# Altium PCB HGD_Sensor(v0.1)-20200729.PcbDoc
Units mm, origin at the board's own origin, x right, y up, seen from the top; angles counter-clockwise.
Board outline 58.4 x 54 mm, 2 copper layers (TopLayer, BottomLayer); 62 components, 38 nets, 190 pads, 4 vias.
Unrouted connection lines stored in the file: 97.
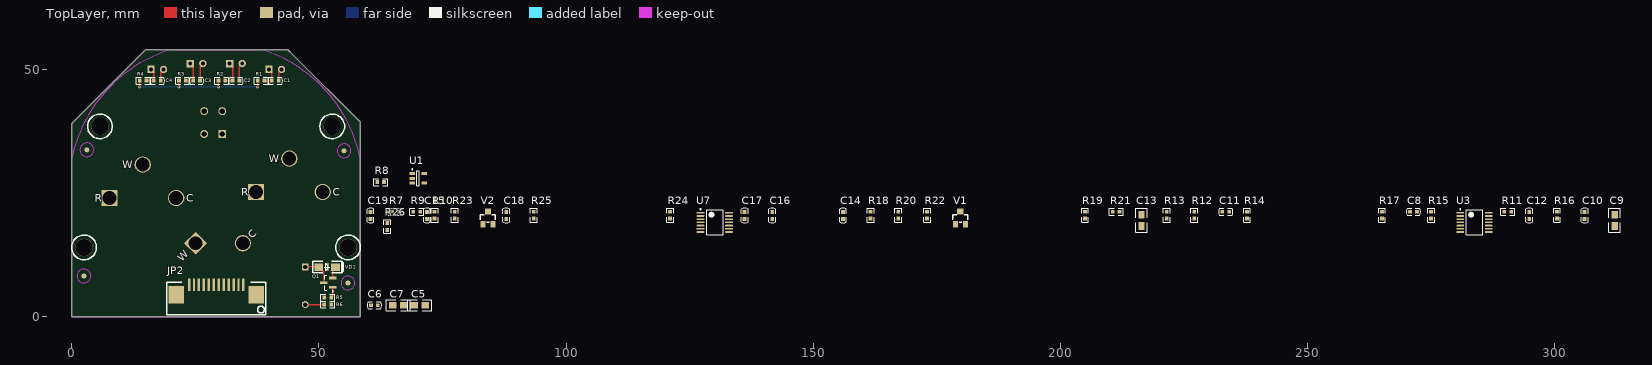
[diagram p0: TopLayer view]
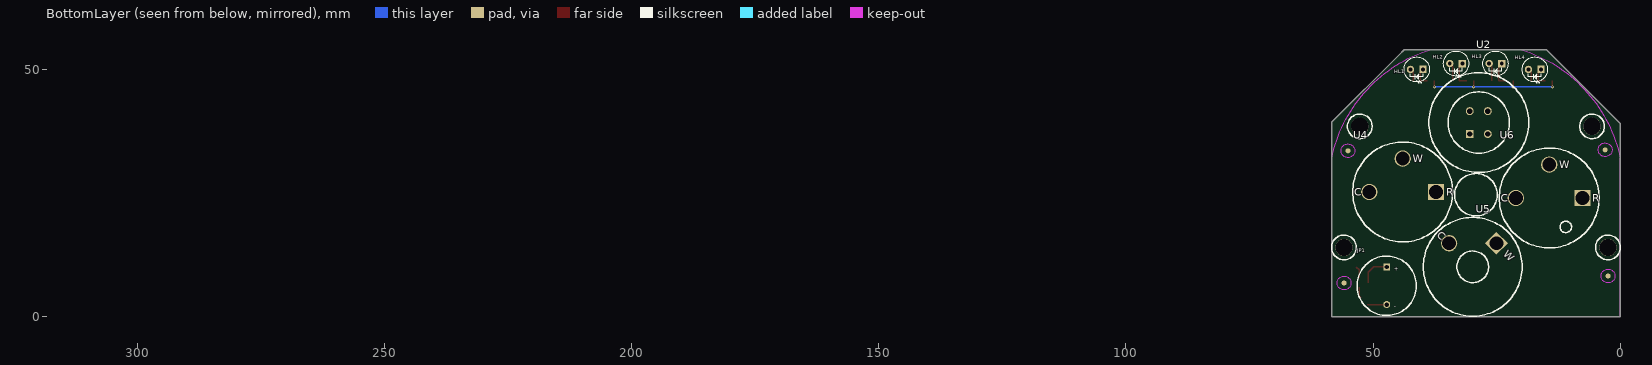
[diagram p1: BottomLayer view, seen from below]

## Layer stack, top to bottom
TopLayer: signal copper 0.0356
Dielectric: core 0.32, FR-4, Dk 4.8
BottomLayer: signal copper 0.0356

## Board outline
0,0 58.4,0 58.4,39.314 44.755,52.959 43.714,54 38.5,54 19.913,54 19.903,53.99 14.899,53.99 0.762,39.853 0,39.091 0,32 0,0

## Design rules (kind name [scope] priority, off if disabled: settings)
Clearance Clearance_2 [InNet('RF_IN') vs InNet('GND')] p1: gap=0.5
Clearance [All] p2: gap=0.254
Clearance Clearance_1 [All] p3: gap=0.254
ComponentClearance [All] p1 off: gap=0.254 collisioncheckmode=3 verticalgap=0.254 showdistances=FALSE
FabricationTestPointUsage TestPointUsage [All] p1: valid=0 allowmultiple=FALSE
FabricationTestpoint Testpoint [(IsPad And (OnTopLayer Or OnBottomLayer))] p1: side=3 testpointundercomponent=TRUE minsize=1.016 maxsize=2.54 preferedsize=1.524 minholesize=0.508 maxholesize=1.016 preferedholesize=0.813 testpointgrid=0.025 allowsidetop=TRUE allowsidebottom=TRUE usegrid=TRUE gridtolerance=0
HoleSize [All] p1: absolutevalues=TRUE maxlimit=5.08 minlimit=0.025 maxpercent=80.000 minpercent=20.000
PolygonConnect [IsVia] p1: connectstyle=Direct reliefconductorwidth=0.254 reliefentries=4 polygonreliefangle="90 Angle"
PolygonConnect PolygonConnect_via [All] p2 off: connectstyle=Relief reliefconductorwidth=0.254 reliefentries=4 polygonreliefangle="90 Angle"
RoomDefinition HGD_Sensor(v0.1)-20200729 [InComponentClass('HGD_Sensor(v0.1)-20200729')] p1: confinementstyle=ConfineIn formatcopy=TRUE lockcomponents=FALSE outline 59.538,1.397 84.455,1.397 84.455,9.677 59.538,9.677
RoutingVias [All] p1: holewidth=0.4 width=0.8 viastyle="Through Hole" minholewidth=0.3 minwidth=0.6 maxholewidth=0.5 maxwidth=1
ShortCircuit [All] p1 off: allowed=FALSE
SilkscreenOverComponentPads [All] p1: minsilkscreentomaskgap=0.254
SolderMaskExpansion [All] p1: expansion=0.102
Width [All] p1: maxlimit=2.54 minlimit=0.127 preferedwidth=0.254
22 further rules are at their usual default settings.

## Components (designator, comment, footprint, x,y, rotation, side; value= is the part's Value field where it differs from the comment)
C1 "100nF/25V/5%" C0603 40.488,47.752 r0 top locked
C2 "100nF/25V/5%" C0603 32.537,47.752 r0 top locked
C3 "100nF/25V/5%" C0603 24.562,47.752 r0 top locked
C4 "100nF/25V/5%" C0603 16.612,47.752 r0 top locked
C5 "1uF/25V/5%" 0805 69.24,2.311 r0 top
C6 "10nF/25V/5%" C0603 60.528,2.311 r0 top
C7 "1uF/25V/5%" 0805 64.897,2.311 r0 top
C8 "10nF/25V/5%" C0603 270.739,21.234 r0 top
C9 "1uF/25V/5%" 0805 312.141,18.339 r90 top
C10 "1uF/25V/5%" C0603 306.07,19.761 r90 top
C11 "10nF/25V/5%" C0603 232.766,21.234 r0 top
C12 "100nF/25V/5%" C0603 294.894,19.761 r90 top
C13 "1uF/25V/5%" 0805 216.408,18.339 r90 top
C14 "10nF/25V/5%" C0603 156.032,19.761 r90 top
C15 "10nF/25V/5%" C0603 71.882,19.761 r90 top
C16 "10nF/25V/5%" C0603 141.707,19.761 r90 top
C17 "100nF/25V/5%" C0603 136.119,19.761 r90 top
C18 "10nF/25V/5%" C0603 87.909,19.761 r90 top
C19 "10nF/25V/5%" C0603 60.452,19.761 r90 top
HL1 "LED红灯" LED-3MM 39.903,50.013 r0 bottom locked
HL2 "LED红灯" LED-3MM 31.953,51.206 r0 bottom locked
HL3 "LED红灯" LED-3MM 23.978,51.206 r0 bottom locked
HL4 "LED红灯" LED-3MM 16.027,50.013 r0 bottom locked
JP1 "TMB-12A03" TMB-12A03 47.244,6.248 r180 bottom locked
JP2 "FPC-12P" FPC-1.0MM-12P-W 29.235,6.426 r180 top
Q1 "S8550" S8550_SOT-23_95P245X110-3N 51.892,6.883 r180 top
R1 "200R/5%" R0603 39.014,47.752 r180 top locked
R2 "200R/5%" R0603 31.064,47.752 r180 top locked
R3 "200R/5%" R0603 23.089,47.752 r180 top locked
R4 "200R/5%" R0603 15.138,47.752 r180 top locked
R5 "4K7/5%" R0603 51.105,3.861 r0 top
R6 "100R/5%" R0603 52.502,2.464 r180 top
R7 "1K/5%" R0603 64.77,21.234 r0 top
R8 "4K7/5%" R0603 61.798,27.229 r0 top
R9 "4K7/5%" R0603 69.088,21.234 r0 top
R10 "4K7/5%" R0603 73.406,19.837 r90 top
R11 "10K/5%" R0603 289.814,21.234 r0 top
R12 "4K7/5%" R0603 227.101,19.837 r90 top
R13 "4K7/5%" R0603 221.513,19.837 r90 top
R14 "100R/5%" R0603 237.769,19.837 r90 top
R15 "470R/5%" R0603 275.006,19.837 r90 top
R16 "10K/5%" R0603 300.482,19.837 r90 top
R17 "10K/5%" R0603 265.074,19.837 r90 top
R18 "1M/5%" R0603 161.62,19.837 r90 top
R19 "200R/5%" R0603 205.003,19.837 r90 top
R20 "200R/5%" R0603 167.208,19.837 r90 top
R21 "47K/5%" R0603 210.591,21.234 r0 top
R22 "10K/5%" R0603 173.05,19.837 r90 top
R23 "1M/5%" R0603 77.47,19.837 r90 top
R24 "1K/5%" R0603 121.056,19.837 r90 top
R25 "1K/5%" R0603 93.472,19.837 r90 top
R26 "100R/5%" R0603 63.83,17.526 r90 top
U1 "SGM2019-3.0YN5G/TR" SGM2019_SOT23-5_95P280X125-5N 70.079,27.991 r0 top
U2 "LEL" LEL 28.626,39.268 r180 bottom locked
U3 "SGM8634" SGM8634_TSSOP14_65P640X120-14N 283.794,19.075 r0 top
U4 "4O2-GP_V2.0" 4O2-GP_V2.0-1.5K-3.2*2.5*5.8 44.018,25.222 r180 bottom locked
U5 "ME2-CO" ME2-CO_1.5K-3.2*2.5*5.8 29.845,10.084 r225 bottom locked
U6 "4H2S-AS_V2.0" 4H2S-AS_V2.0-1.5K-3.0*2.5*5.8 14.376,24.003 r180 bottom locked
U7 "SGM8634" SGM8634_TSSOP14_65P640X120-14N 130.099,19.075 r0 top
V1 "MOSFET_P" SOT-23-MOS 179.781,20.117 r0 top
V2 "MOSFET_P" SOT-23-MOS 84.201,20.117 r0 top
VD1 "1N4148" LL-34 49.962,10.033 r0 top

## Footprints (in the part's own frame and the unit in brackets; to place one, negate y for a bottom-side part, rotate by r counter-clockwise, add the part's x,y. Pads: shape width x height; smd on the part's side, far side on the other; paste and mask are expansions set on the pad)
4H2S-AS_V2.0-1.5K-3.0*2.5*5.8 [mm] "4H2S-AS_V2.0：H2S传感器，4系列插针"
  rect 3.3x3.3 hole 2.8: 1(6.75,0)
  round 3.3 hole 2.8: 2(0,6.75) 3(-6.75,0)
  silkscreen extent -10.1,-10.1 10.1,10.1
4O2-GP_V2.0-1.5K-3.2*2.5*5.8 [mm] "4O2-GP_V2.0：O2传感器，4系列插针"
  rect 3.3x3.3 hole 2.8: 1(6.75,0)
  round 3.3 hole 2.8: 2(0,6.75) 3(-6.75,0)
  silkscreen extent -10.1,-10.1 10.1,10.1
0805 [mil]
  rect 60x50 smd: 1(0,0) 2(90,0)
  silkscreen extent -50,-45 140,45
C0603 [mil] "C0603封装电容"
  rect 30x30 smd: 1(0,0) 2(55,0)
  silkscreen extent -30,-28 85,28
FPC-1.0MM-12P-W [mm] "FPC-1.0MM-12P-W：卧式，抽拉式上接，12P"
  rect 3.2x3.5 smd: 0(-8.1,2) 0(8.1,2)
  rect 0.5x2.5 smd: 1(-5.5,0) 2(-4.5,0) 3(-3.5,0) 4(-2.5,0) 5(-1.5,0) 6(-0.5,0) 7(0.5,0) 8(1.5,0) 9(2.5,0) 10(3.5,0) 11(4.5,0) 12(5.5,0)
  silkscreen extent -10,-0.5 10,6
LED-3MM [mm]
  rect 1.5x1.5 hole 0.8: A(0,0)
  round 1.5 hole 0.8: K(2.54,0)
  silkscreen extent -1.27,-2.54 3.81,2.79
LEL [mm] "LEL：可燃气体传感器"
  rect 1.6x1.6 hole 1.1: 1(-1.83,-2.32)
  round 1.6 hole 1.1: 2(1.83,-2.32) 3(1.83,2.32) 4(-1.83,2.32)
  silkscreen extent -10.1,-10.1 10.1,10.1
LL-34 [mil] "开关二极管LL-34封装"
  rect 70x60 smd: A(0,0) K(135,0)
  silkscreen extent -48,-45 198,45
ME2-CO_1.5K-3.2*2.5*5.8 [mm] "ME2-CO：CO传感器，4系列插针"
  rect 3.3x3.3 hole 2.8: 1(0,6.75)
  round 3.3 hole 2.8: 2(-6.75,0)
  silkscreen extent -10,-10 10,10
R0603 [mil] "R0603封装电阻"
  rect 30x30 smd: 1(0,0) 2(55,0)
  silkscreen extent -28,-28 82,28
S8550_SOT-23_95P245X110-3N [mm] "SOT23, 3-Leads, Body 3.0x2.6mm (max), Pitch 0.95mm, IPC Medium Density"
  rect 1.55x0.55 smd: 1(-0.925,0.95) 2(-0.925,-0.95) 3(0.925,0)
  silkscreen extent -1.05,-1.5 0.7,1.9, body extent -0.7,-1.5 0.7,1.5, height 1.1
SGM2019_SOT23-5_95P280X125-5N [mm] "SOT23, 5-Leads, Body 3.0x3.0mm (max), Pitch 0.95mm, IPC Medium Density"
  rect 1.1x0.6 smd: 1(-1.2,0.95) 2(-1.2,0) 3(-1.2,-0.95) 4(1.2,-0.95) 5(1.2,0.95)
  silkscreen extent -1.32,-1.5 0.25,1.92, body extent -0.85,-1.51 0.85,1.51, height 1.25
SGM8634_TSSOP14_65P640X120-14N [mm] "TSOP, 14-Leads, Body 5.1x4.5mm (max), Pitch 0.65mm, IPC Medium Density"
  rect 1.6x0.35 smd: 1(-2.875,1.95)
  oval 1.6x0.35 smd: 2(-2.875,1.3) 3(-2.875,0.65) 4(-2.875,0) 5(-2.875,-0.65) 6(-2.875,-1.3) 7(-2.875,-1.95) 8(2.875,-1.95) 9(2.875,-1.3) 10(2.875,-0.65) 11(2.875,0) 12(2.875,0.65) 13(2.875,1.3) 14(2.875,1.95)
  silkscreen extent -3,-2.55 1.68,2.8, body extent -2.25,-2.55 2.25,2.55, height 1.2
SOT-23-MOS [mil]
  rect 50x50 smd: D(0,45)
  rect 40x50 smd: G(-40,-55) S(40,-55)
  silkscreen extent -60,-40 60,20
TMB-12A03 [mm] "TMB-12A03：3.3V有源蜂鸣器"
  rect 1.4x1.4 hole 0.9: 1(0,3.8)
  round 1.4 hole 0.9: 2(0,-3.8)
  silkscreen extent -6,-6 6,6

## Part data
C1 C2 C3 C4 C5 C6 C7 C8 C9 C10 C11 C12 C13 C14 C15 C16 C17 C18 C19: library part CAP, "电容"
HL1 HL2 HL3 HL4: library part 发光二极管, "发光二极管"
JP1: "TMB-12A03：3.3V有源蜂鸣器"
Q1: "S8550 PNP型硅三极管"
R1 R2 R3 R4 R5 R6 R7 R8 R9 R10 R11 R12 R13 R14 R15 R16 R17 R18 R19 R20 R21 R22 R23 R24 R25 R26: library part RES2, "电阻"
U1: library part SGM2019, "SGM2019：Low Power, Low Dropout, RF Linear Regulators"
U2: library part MC101, "MC101：可燃气体传感器"
U3 U7: "SGM8634：470μA, 6MHz, Rail-to-Rail I/O, CMOS Operational Amplifier"
U4: "4O2-GP_V2.0：O2传感器"
U5: "ME2-CO：CO传感器"
U6: "4H2S-AS_V2.0：H2S传感器"
V1 V2: "P沟道绝缘栅场效应管_增强型"
VD1: library part 开关二极管, "开关二极管"

## Free pads (board coordinates)
  round 1.016 smd far side: 0(2.464,8.23) 0(3.048,33.757) 0(55.093,33.553) 0(55.88,6.807)
  round 3.5 hole 3.5: 0(2.5,14) 0(5.7,38.5) 0(52.7,38.5) 0(55.9,14)
  round 1.016 smd: 1(2.464,8.23) 1(3.048,33.757) 1(55.093,33.553) 1(55.88,6.807)
  round 2.54 on Bottom Solder: 2(2.464,8.23) 2(3.048,33.757) 2(55.093,33.553) 2(55.88,6.807)
  round 2.54 on Top Solder: 3(2.464,8.23) 3(3.048,33.757) 3(55.093,33.553) 3(55.88,6.807)

## Via types
v1: diameter 0.61, hole 0.305, TopLayer to BottomLayer, 4 vias

## Nets (pads, with @x,y where several pads share a name; then routed paths per layer and width w, separated by ;. In a path a pad name is that pad's centre, name@x,y a point inside that pad or via, vN(x,y) a via of type N, cw(c..) or ccw(c..) an arc to the next point about the centre after c; other vN are vias at no path point)
3V: C7.1 C12.2 R9.2 R10.2 U1.5 U2.3 U3.4
3V3: C5.1 C17.2 JP2.1 Q1.2 R1.2 R2.2 R3.2 R4.2 R12.2 R18.2 R23.2 U1.1 U1.3 U7.4 VD1.K | length 31.4
  TopLayer w0.254: v1(13.741,46.482) R4.2 ; v1(21.692,46.482) R3.2 ; v1(29.667,46.482) R2.2 ; v1(37.617,46.482) R1.2 ; Q1.2 52.817,9.459 VD1.K
  BottomLayer w0.254: v1(13.741,46.482) v1(21.692,46.482) v1(29.667,46.482) v1(37.617,46.482)
ADC_CO: C14.1 JP2.5 R22.1
ADC_H2S: C18.1 C19.1 JP2.6 R26.2 U7.7
ADC_LEL: C8.1 JP2.7 R11.1
ADC_O2: C11.1 JP2.4 R17.1
AGND: R14.1 R20.2 U3.3 U3.5 U3.8 U3.9 U4.2 U5.2 U7.3 U7.5 V1.S
BEEP: JP2.10 R5.1
DGND: C5.2 C6.2 C7.2 C8.2 C10.2 C11.2 C12.1 C14.2 C19.2 JP2.2 R6.1 R13.2 U1.2 U2.1 U3.11 U7.11
H2S_C: C15.1 C16.2 C18.2 R26.1 U6.2 U6.3 U7.1 U7.6 V2.S
H2S_R: R25.2 U6.1 V2.D
LED1: C1.2 HL1.K | length 2.5
  TopLayer w0.254: C1.2 41.885,49.454 HL1.K
LED2: C2.2 HL2.K | length 3.7
  TopLayer w0.254: C2.2 33.934,50.648 HL2.K
LED3: C3.2 HL3.K | length 3.7
  TopLayer w0.254: C3.2 25.959,50.648 HL3.K
LED4: C4.2 HL4.K | length 2.5
  TopLayer w0.254: C4.2 18.009,49.454 HL4.K
NetC1_1: C1.1 HL1.A R1.1 | length 4
  TopLayer w0.254: R1.1 C1.1 40.488,49.428 HL1.A
NetC2_1: C2.1 HL2.A R2.1 | length 5.2
  TopLayer w0.254: R2.1 C2.1 32.537,50.622 HL2.A
NetC3_1: C3.1 HL3.A R3.1 | length 5.2
  TopLayer w0.254: R3.1 C3.1 24.562,50.622 HL3.A
NetC4_1: C4.1 HL4.A R4.1 | length 4
  TopLayer w0.254: R4.1 C4.1 16.612,49.428 HL4.A
NetC6_1: C6.1 U1.4
NetC9_1: C9.1 C10.1 R15.2 R16.2 U3.2
NetC9_2: C9.2 R16.1 R17.2 U3.1
NetC13_1: C13.1 R19.1 R21.1 U3.6
NetC13_2: C13.2 R21.2 R22.2 U3.7
NetC15_2: C15.2 R24.2 R25.1
NetC16_1: C16.1 R24.1 U7.2
NetJP1_1: JP1.1 Q1.3 VD1.A | length 6.3
  TopLayer w0.254: JP1.1 VD1.A@49.946,10.048 ; VD1.A@49.946,10.033 VD1.A@49.946,10.048 ; Q1.3 50.967,9.028 VD1.A VD1.A@49.946,10.048
NetJP1_2: JP1.2 R6.2 | length 3.9
  TopLayer w0.254: JP1.2 51.089,2.448 R6.2
NetQ1_1: Q1.1 R5.2 | length 2.2
  TopLayer w0.254: R5.2 52.817,4.176 Q1.1
NetR7_1: R7.1 R8.2 U3.13
NetR7_2: R7.2 U2.2 U2.4
NetR8_1: R8.1 R11.2 U3.14
NetR9_1: R9.1 R10.1 U3.12
NetR12_1: R12.1 R13.1 U3.10
NetR14_2: R14.2 R15.1 U4.3
NetR18_1: R18.1 V1.G
NetR19_2: R19.2 R20.1 U5.1 V1.D
NetR23_1: R23.1 V2.G
pads on no net: C17.1 JP2.0 JP2.3 JP2.8 JP2.9 JP2.11 JP2.12 U4.1 U7.8 U7.9 U7.10 U7.12 U7.13 U7.14

## Keep-outs
TopLayer:
  circle w0.127: c3.048,33.757 r1.397
  circle w0.127: c2.464,8.23 r1.397
  circle w0.127: c55.093,33.553 r1.397
  circle w0.127: c55.88,6.807 r1.397
BottomLayer:
  circle w0.127: c3.048,33.757 r1.397
  circle w0.127: c2.464,8.23 r1.397
  circle w0.127: c55.093,33.553 r1.397
  circle w0.127: c55.88,6.807 r1.397
KeepOutLayer:
  lines w0.127: 19.9,54 38.5,54 ; 19.903,53.99 ccw(c28.74,25.989) 0,32 0,0 58.4,0 58.4,32 ccw(c29.645,25.998) 38.502,54.006

## Silkscreen, mask and mechanical layers (free items; w line width, h text height)
TopOverlay:
  circle w0.254: c55.9,14 r2.5
  circle w0.254: c2.5,14 r2.5
  circle w0.254: c5.7,38.5 r2.5
  circle w0.254: c52.7,38.5 r2.5
BottomOverlay:
  circle w0.254: c29.2,24.663 r4.3
  circle w0.254: c2.5,14 r2.5
  circle w0.254: c55.9,14 r2.5
  circle w0.254: c5.7,38.5 r2.5
  circle w0.254: c52.7,38.5 r2.5

## Text inside footprints (layer, text, board x,y; h text height)
JP1: BottomOverlay "+" at 45.744,9.286 h0.76; BottomOverlay "-" at 45.744,1.686 h0.76
U4: BottomOverlay "R" at 35.239,24.46 h1.52; BottomOverlay "W" at 41.964,31.21 h1.52; BottomOverlay "C" at 53.798,24.46 h1.52; TopOverlay "R" at 34.264,24.46 h1.52; TopOverlay "W" at 41.964,31.21 h1.52; TopOverlay "C" at 52.798,24.46 h1.52
U5: BottomOverlay "W" at 23.815,12.522 h1.52 r45; BottomOverlay "C" at 37.245,16.406 h1.52 r45; TopOverlay "C" at 36.544,15.705 h1.52 r45; TopOverlay "W" at 23.815,12.522 h1.52 r45
U6: BottomOverlay "R" at 5.639,23.241 h1.52; BottomOverlay "W" at 12.322,29.991 h1.52; BottomOverlay "C" at 24.13,23.241 h1.52; TopOverlay "R" at 4.622,23.241 h1.52; TopOverlay "W" at 12.319,29.997 h1.52; TopOverlay "C" at 23.13,23.241 h1.52